# Altium PCB msxbreakout_slim.PcbDoc
Units mil, origin at the board's own origin, x right, y up, seen from the top; angles counter-clockwise.
Board outline 2561 x 2527 mil, 2 copper layers (Top Layer, Bottom Layer), stack 65.74 mil thick; 63 components, 100 nets, 277 pads, 162 vias.
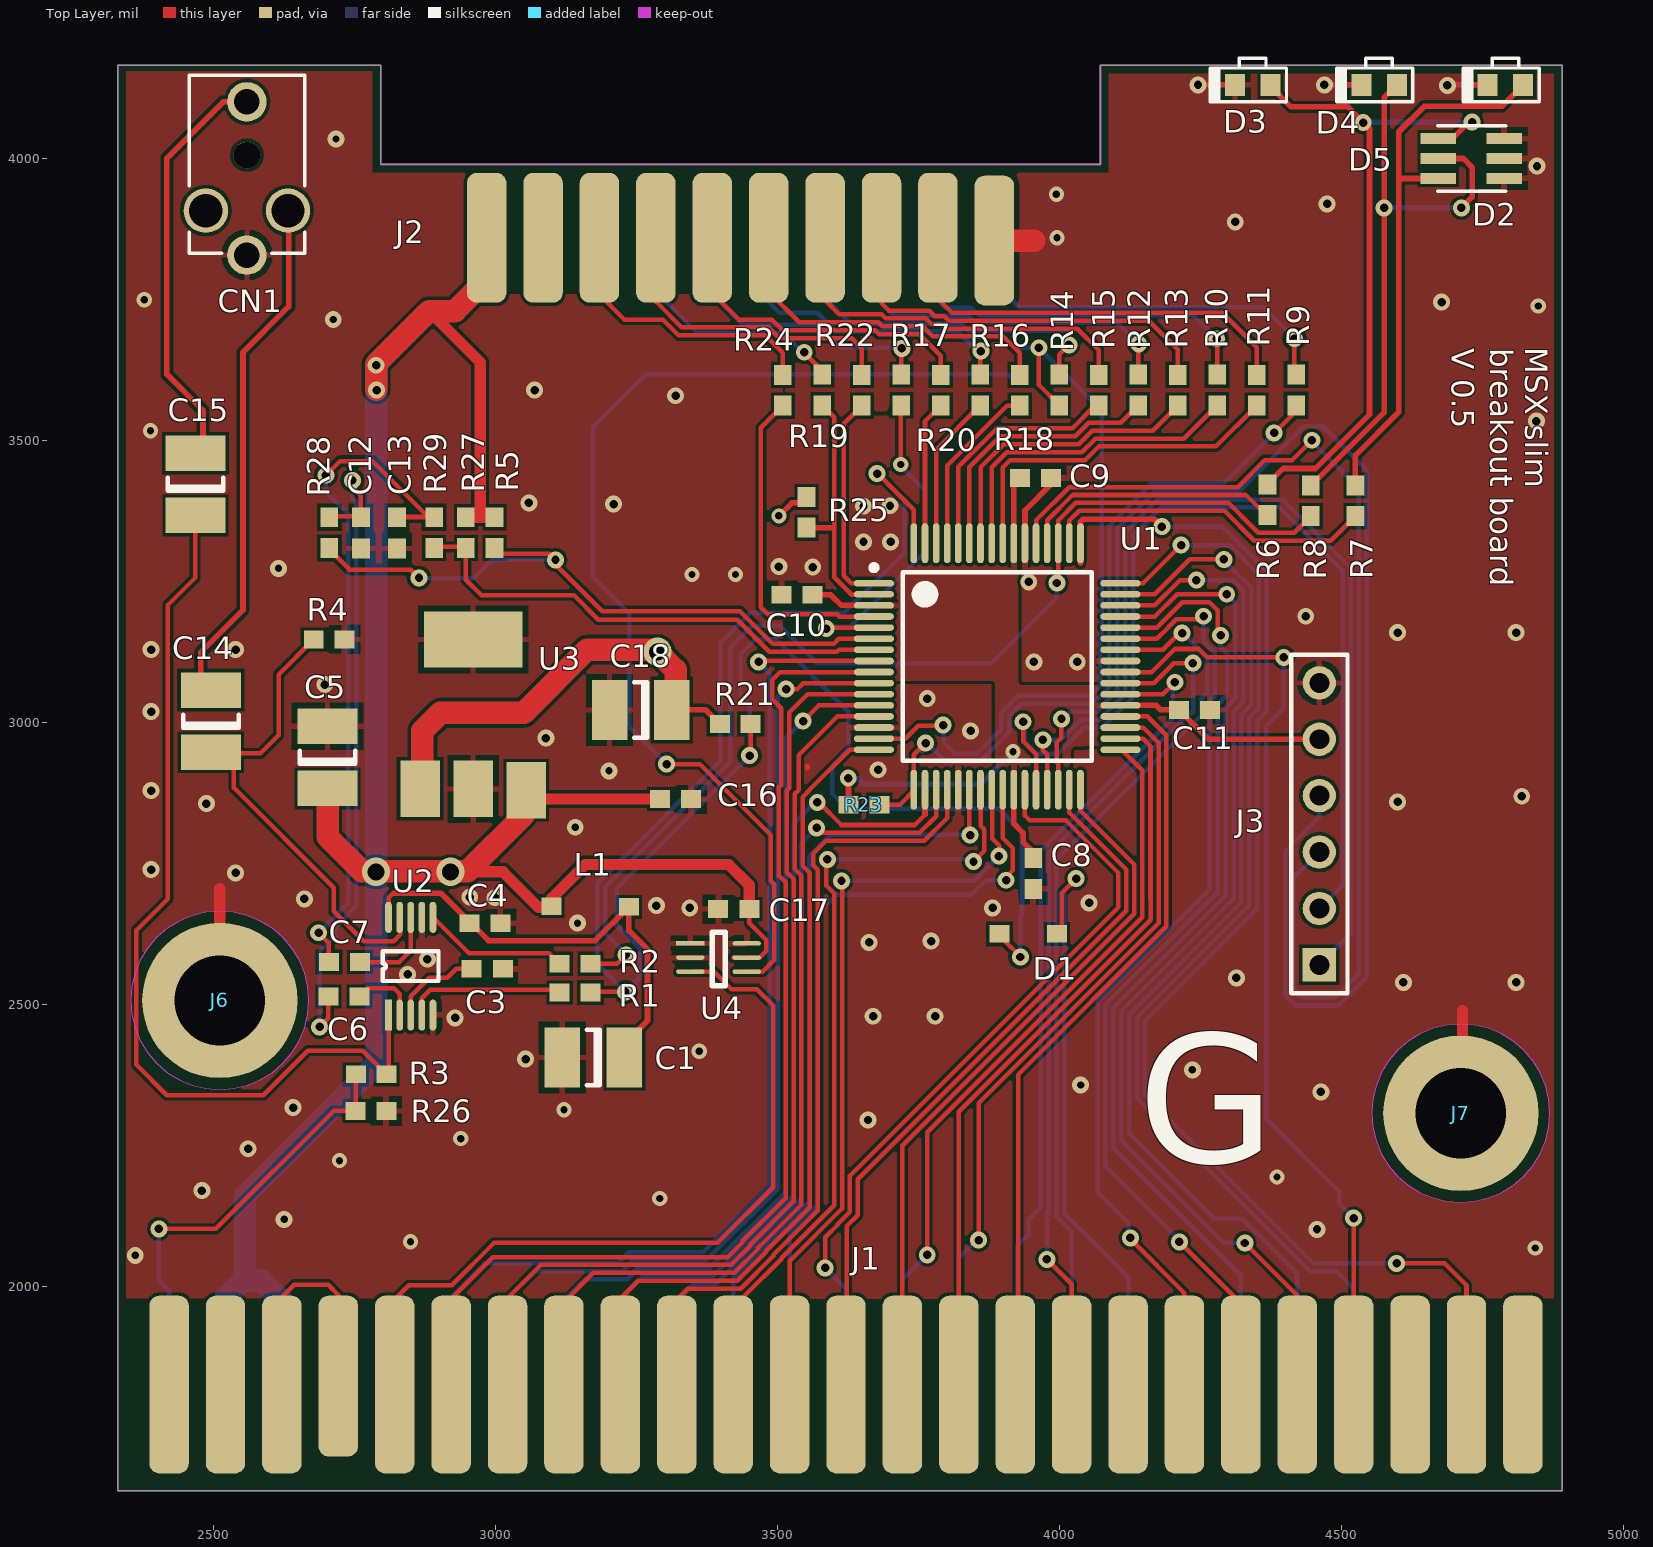
[diagram p0: Top Layer view]
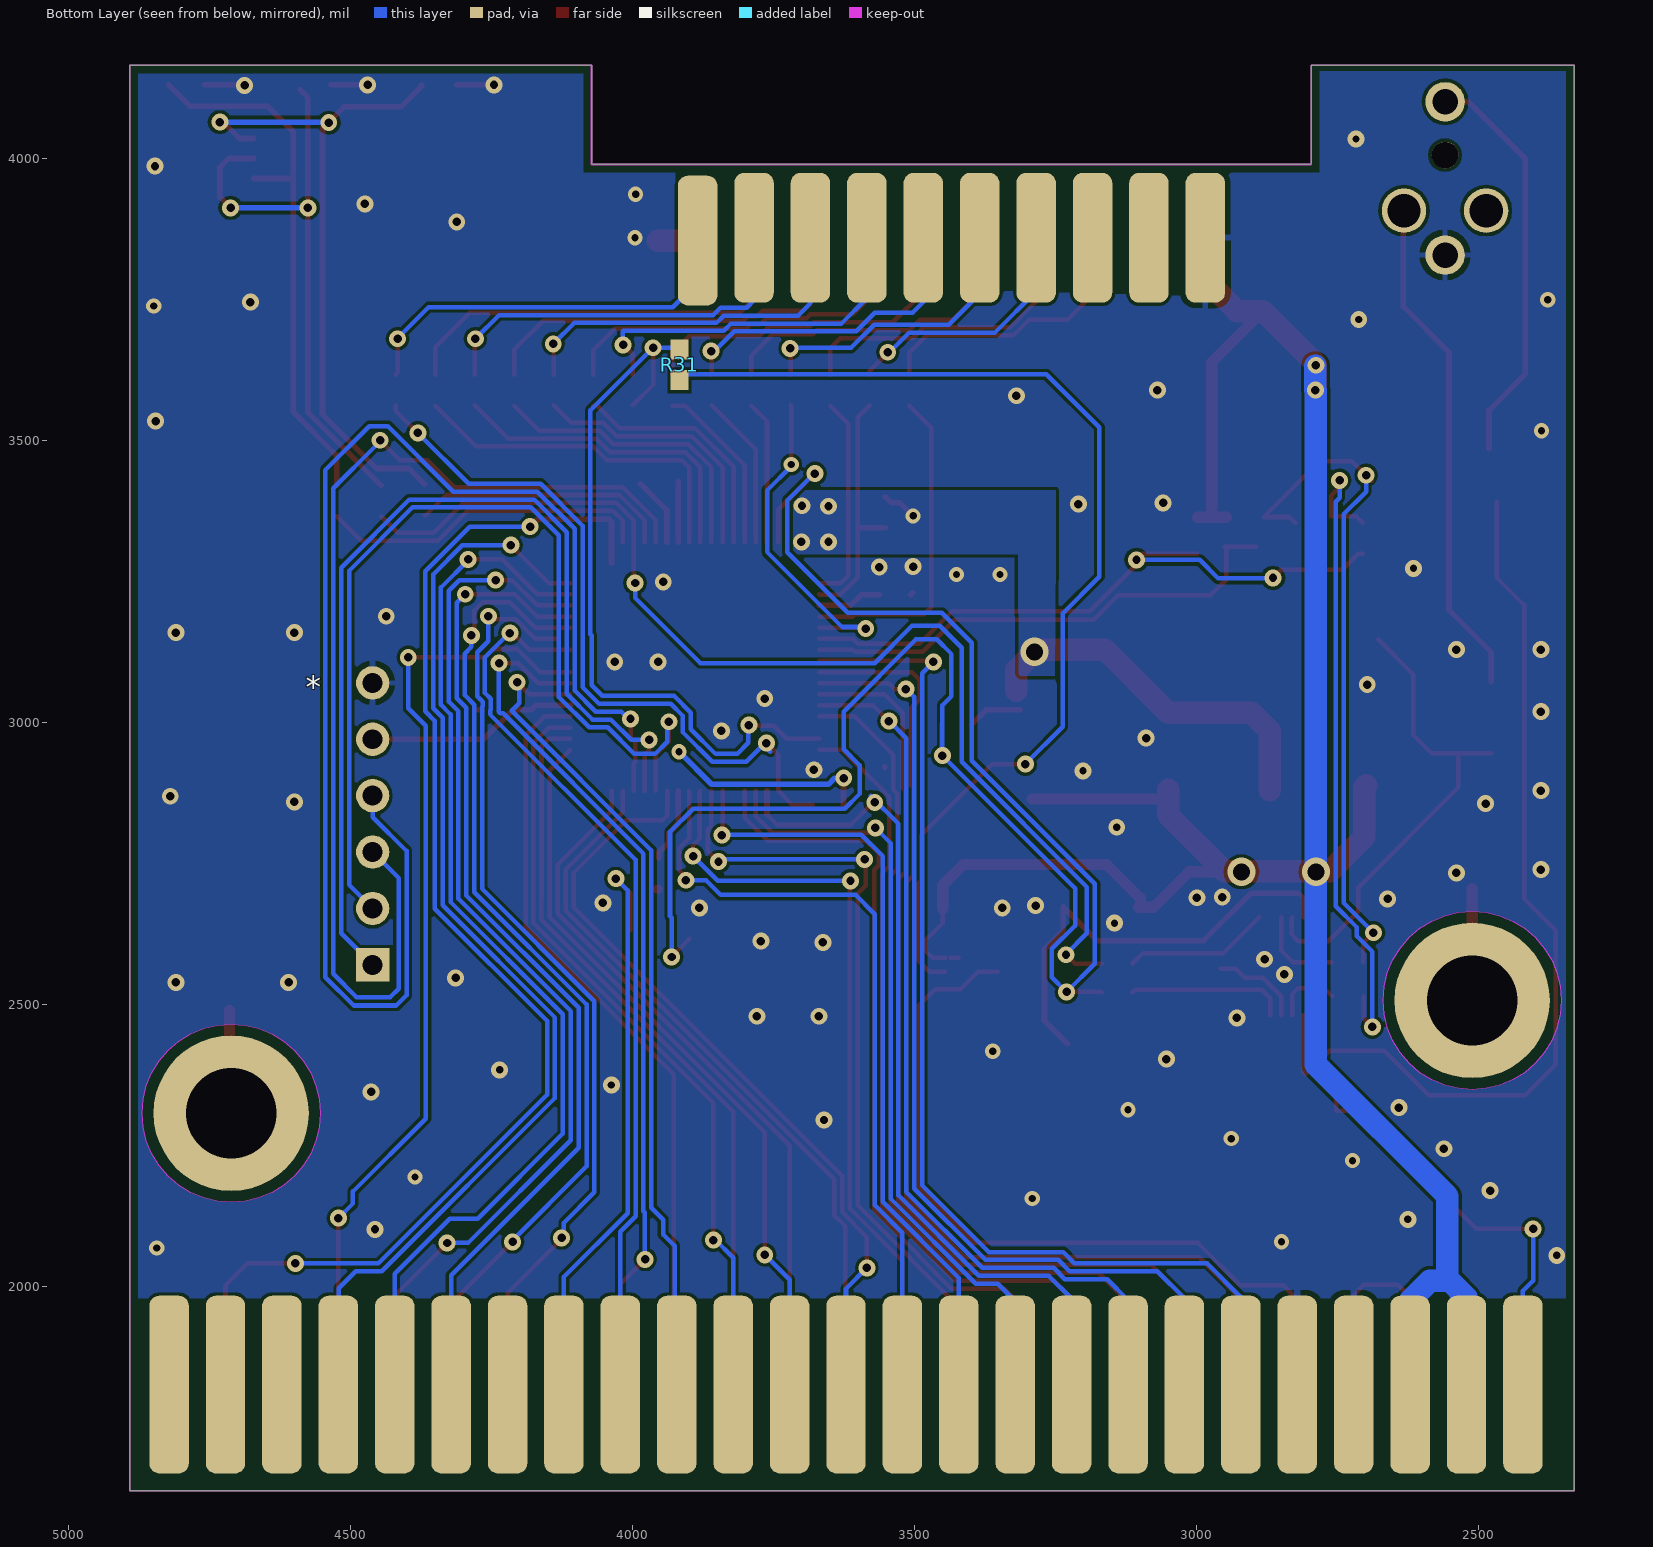
[diagram p1: Bottom Layer view, seen from below]
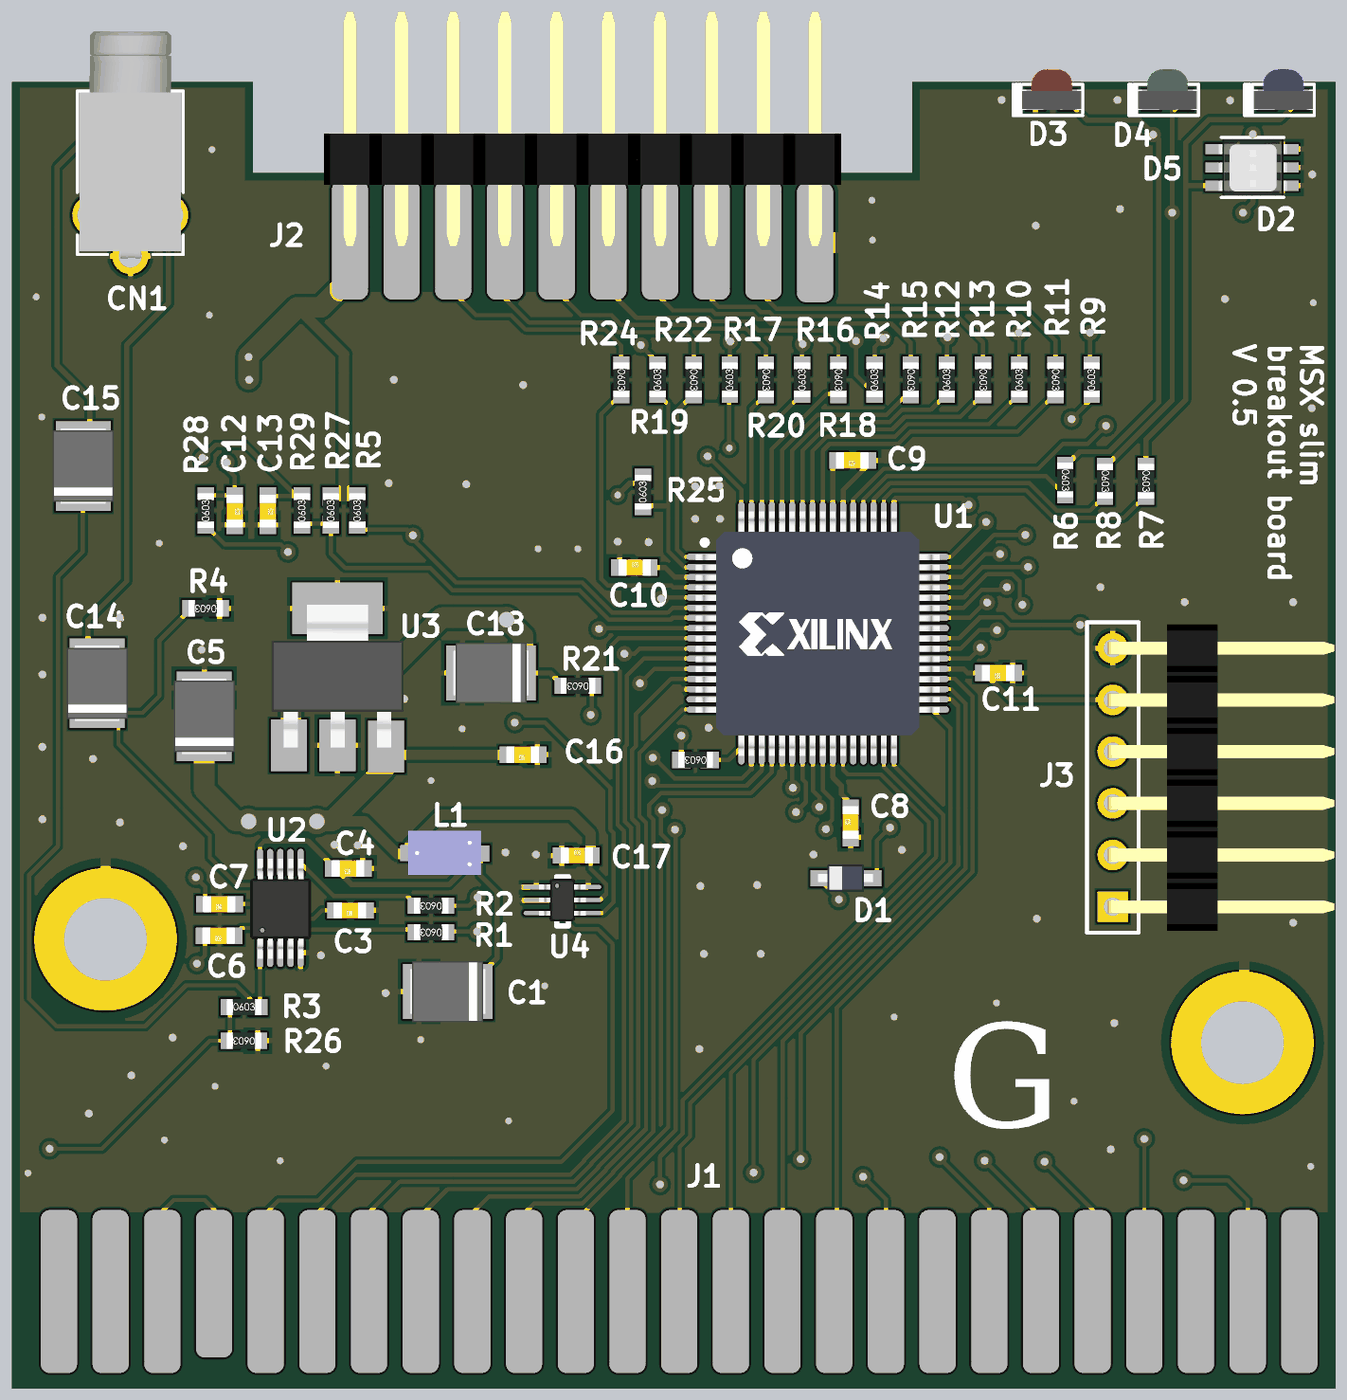
[diagram p2: 3D render of the assembled board from above, using the file's embedded part models]

## Layer stack, top to bottom
Top Solder: solder mask 0.4, Solder Resist, Dk 3.5
Top Layer: signal copper 1.37
Dielectric1: core 63, FR-4, Dk 4.2
Bottom Layer: signal copper 1.37
Bottom Solder: solder mask 0.4, Solder Resist, Dk 3.5

## Board outline
2331,1639 2331,4166 2797,4166 2797,3990 4073,3990 4073,4166 4892,4166 4892,1639

## Design rules (kind name [scope] priority, off if disabled: settings)
Clearance [All] p1: gap=6
HoleSize [All] p1: absolutevalues=TRUE maxlimit=200 minlimit=13 maxpercent=80.000 minpercent=20.000
MinimumAnnularRing [All] p1: minimumring=7
MinimumSolderMaskSliver [All] p1: minsoldermaskwidth=6
PolygonConnect PolygonConnect_Pads [(InPadClass('All Pads'))] p1: connectstyle=Relief reliefconductorwidth=10 reliefentries=4 polygonreliefangle="90 Angle" airgapwidth=10
PolygonConnect [All] p2: connectstyle=Direct reliefconductorwidth=10 reliefentries=4 polygonreliefangle="90 Angle" airgapwidth=10
RoomDefinition msxbreakout_slim [InComponentClass('msxbreakout_slim')] p1: confinementstyle=ConfineIn formatcopy=TRUE lockcomponents=FALSE outline 2071,1578 5147,1578 5147,4365 2071,4365
RoutingVias [All] p1: holewidth=15 width=30 viastyle="Through Hole" minholewidth=13 minwidth=30 maxholewidth=50 maxwidth=50
SilkToSilkClearance [All] p1: silktosilkclearance=6
SilkToSolderMaskClearance SilkscreenOverComponentPads [IsPad] p1: minsilkscreentomaskgap=6 clearancetoexposedcopper=TRUE
SolderMaskExpansion [All] p1: expansion=4
UnpouredPolygon [All] p1: allowunpoured=FALSE
Width [All] p1: maxlimit=50 minlimit=8 preferedwidth=10
25 further rules are at their usual default settings.

## Components (designator, comment, footprint, x,y, rotation, side; value= is the part's Value field where it differs from the comment)
C1 "Cap Pol1" cap1210POL 3174,2407 r180 top
C3 "Cap" cap0603 2986,2564 r180 top
C4 "Cap" cap0603 2982,2645 r180 top
C5 "Cap Pol1" cap1210POL 2703,2939 r90 top
C6 "Cap" cap0603 2732,2515 r180 top
C7 "Cap" cap0603 2733,2576 r180 top
C8 "Cap" cap0603 3954,2733 r90 top
C9 "Cap" cap0603 3958,3434 r180 top
C10 "Cap" cap0603 3535,3227 r0 top
C11 "Cap" cap0603 4240,3023 r180 top
C12 "Cap" cap0603 2762,3337 r270 top
C13 "Cap" cap0603 2826,3337 r270 top
C14 "Cap Pol1" cap1210POL 2496,3003 r90 top
C15 "Cap Pol1" cap1210POL 2469,3423 r90 top
C16 "Cap" cap0603 3320,2865 r180 top
C17 "Cap" cap0603 3423,2670 r0 top
C18 "Cap Pol1" cap1210POL 3258,3023 r180 top
CN1 "PhoneJackStereo 4" SJ1-2503A 2560,4101 r90 top
D1 "Diode" SOD323F 3894,2626 r0 top
D2 "ASMT-YTC2-0AA02" ASMT-YTC2-0AA02 4789,4036 r0 top
D3 "APA1606SURCK" LED-0603_LAMP_RED 4343,4131 r180 top
D4 "APA1606SURCK" LED-0603_LAMP_GREEN 4567,4131 r180 top
D5 "APA1606SURCK" LED-0603_LAMP_BLUE 4791,4131 r180 top
J1 "msxcart" msxcart 2422,1777 r0 top
J2 "Header 10X2" HDR2X10_90 2815,3310 r180 top
J3 "Header 1X6" HDR1X6_90 4461,2571 r90 top
J6 "MountHole" MOUNTHOLE 2512,2508 r0 top
J7 "MountHole" MOUNTHOLE 4712,2308 r0 top
L1 "Inductor" ind1206 3168,2675 r0 top
R1 "Res1" res0603 3142,2522 r180 top
R2 "Res1" res0603 3142,2573 r180 top
R3 "Res1" res0603 2780,2377 r0 top
R4 "Res1" res0603 2706,3148 r180 top
R5 "Res1" res0603 2999,3337 r90 top
R6 "Res1" res0603 4369,3396 r270 top
R7 "Res1" res0603 4525,3394 r270 top
R8 "Res1" res0603 4446,3394 r270 top
R9 "Res1" res0603 4420,3590 r90 top
R10 "Res1" res0603 4280,3590 r90 top
R11 "Res1" res0603 4350,3590 r270 top
R12 "Res1" res0603 4140,3590 r90 top
R13 "Res1" res0603 4210,3590 r270 top
R14 "Res1" res0603 4000,3590 r90 top
R15 "Res1" res0603 4070,3590 r270 top
R16 "Res1" res0603 3860,3590 r90 top
R17 "Res1" res0603 3720,3590 r90 top
R18 "Res1" res0603 3930,3590 r270 top
R19 "Res1" res0603 3580,3590 r90 top
R20 "Res1" res0603 3790,3590 r270 top
R21 "Res1" res0603 3426,2998 r180 top
R22 "Res1" res0603 3650,3590 r270 top
R23 "Res1" res0603 3654,2855 r180 top
R24 "Res1" res0603 3510,3590 r270 top
R25 "Res1" res0603 3552,3373 r90 top
R26 "Res1" res0603 2780,2312 r180 top
R27 "Res1" res0603 2948,3337 r90 top
R28 "Res1" res0603 2706,3337 r90 top
R29 "Res1" res0603 2892,3337 r90 top
R31 "Res1" res0603 3917,3635 r270 bottom
U1 "XC9572XL-10VQG64C" VQG64_N 3890,3100 r0 top
U2 "LM4811MM" LM4811MM 2811,2482 r90 top
U3 "Regulator 3V3" sot223_4 2961,2883 r180 top
U4 "74LVC1G57" "SOT-363 PKG" 3121,2669 r0 top

## Footprints (in the part's own frame and the unit in brackets; to place one, negate y for a bottom-side part, rotate by r counter-clockwise, add the part's x,y. Pads: shape width x height; smd on the part's side, far side on the other; paste and mask are expansions set on the pad)
ASMT-YTC2-0AA02 [mm] "LED HIGH BRIGHTNESS RGB 6PLCC"
  rect 1.6x0.5 smd: 1(0,-1.8) 2(0,-0.9) 3(0,0) 4(-2.975,0) 5(-2.975,-0.9) 6(-2.975,-1.8)
  silkscreen extent -3,-2.37 0.08,0.58, body extent -3.15,-2.3 0.25,0.5, height 1.81
cap0603 [mm] "Capacitor 0603"
  rect 0.9x0.8 smd: 1(-0.7,0) 2(0.7,0)
  body extent -0.78,-0.4 0.83,0.4, height 0.3
cap1210POL [mm] "Mixxeo"
  rect 1.6x2.7 smd: 1(-1.4,0) 2(1.4,0)
  silkscreen extent -0.3,-1.25 0.3,1.25, body extent -1.85,-1.5 1.85,1.5, height 1.2
HDR1X6_90 [mm] "Connector; Header; 6 Position"
  rect 1.5x1.5 hole 0.9: 1(0,0)
  round 1.5 hole 0.9: 2(2.54,0) 3(5.08,0) 4(7.62,0) 5(10.16,0) 6(12.7,0)
  silkscreen extent -1.27,-1.27 13.97,1.27, body extent -1.17,-10.89 13.87,0.25, height 2.27
HDR2X10_90 [mil]
  rrect50% 70x230 smd far side: 1(-1070,-545) 3(-970,-550) 5(-870,-550) 7(-770,-550) 9(-670,-550) 11(-570,-550) 13(-470,-550) 15(-370,-550) 17(-270,-550) 19(-170,-550)
  rrect50% 70x230 smd: 2(-1070,-545) 4(-970,-550) 6(-870,-550) 8(-770,-550) 10(-670,-550) 12(-570,-550) 14(-470,-550) 16(-370,-550) 18(-270,-550) 20(-170,-550)
  body extent -1120,-992 -120,-539, height 66
ind1206 [mm]
  rect 0.9x0.8 smd: 1(-1.727,0) 2(1.753,-0.025)
  body extent -1.78,-1.08 1.78,1.08, height 1.51
LED-0603_LAMP_BLUE [mm]
  rect 0.9x1 smd: 1(-0.8,0) 2(0.8,0)
  silkscreen extent -1.52,-1.2 1.91,0.76, body extent -1.5,-1.5 1.5,0.5, height 1
LED-0603_LAMP_GREEN [mm]
  rect 0.9x1 smd: 1(-0.8,0) 2(0.8,0)
  silkscreen extent -1.52,-1.2 1.91,0.76, body extent -1.5,-1.5 1.5,0.5, height 1
LED-0603_LAMP_RED [mm]
  rect 0.9x1 smd: 1(-0.8,0) 2(0.8,0)
  silkscreen extent -1.52,-1.2 1.91,0.76, body extent -1.5,-1.5 1.5,0.5, height 1
LM4811MM [mm]
  rect 1.4x0.3 smd: 1(0,0)
  oval 1.4x0.3 smd: 2(0,-0.5) 3(0,-1) 4(0,-1.5) 5(0,-2) 6(4.4,-2) 7(4.4,-1.5) 8(4.4,-1) 9(4.4,-0.5) 10(4.4,0)
  silkscreen extent 1.53,-2.25 2.87,0.25, body extent -0.29,-2.52 4.61,0.48, height 1.15
MOUNTHOLE [mm]
  round 7 hole 4.064: 1(0,0)
  Keep-Out Layer pour cut-out: 4.012,0 3.963,0.628 3.816,1.24 3.575,1.822 3.246,2.358 2.837,2.837 2.358,3.246 1.822,3.575 1.24,3.816 0.628,3.963 0,4.012 -0.628,3.963 -1.24,3.816 -1.822,3.575 -2.358,3.246 -2.837,2.837 -3.246,2.358 -3.575,1.822 -3.816,1.24 -3.963,0.628 -4.012,0 -3.963,-0.628 -3.816,-1.24 -3.575,-1.822 -3.246,-2.358 -2.837,-2.837 -2.358,-3.246 -1.822,-3.575 -1.24,-3.816 -0.628,-3.963 0,-4.012 0.628,-3.963 1.24,-3.816 1.822,-3.575 2.358,-3.246 2.837,-2.837 3.246,-2.358 3.575,-1.822 3.816,-1.24 3.963,-0.628 4.012,0
msxcart [mil] "MSX cartridge"
  rrect50% 70x314.96 smd far side: 1(2400,50) 3(2300,50) 5(2200,50) 7(2100,50) 9(2000,50) 11(1900,50) 13(1800,50) 15(1700,50) 17(1600,50) 19(1500,50) 21(1400,50) 23(1300,50) 25(1200,50) 27(1100,50) 29(1000,50) 31(900,50) 33(800,50) 35(700,50) 37(600,50) 39(500,50) 41(400,50) 43(300,50) 45(200,50) 47(100,50) 49(0,50)
  rrect50% 70x314.96 smd: 2(2400,50) 4(2300,50) 6(2200,50) 8(2100,50) 10(2000,50) 12(1900,50) 14(1800,50) 16(1700,50) 18(1600,50) 20(1500,50) 22(1400,50) 24(1300,50) 26(1200,50) 28(1100,50) 30(1000,50) 32(900,50) 34(800,50) 36(700,50) 38(600,50) 40(500,50) 42(400,50) 46(200,50) 48(100,50) 50(0,50)
  rrect50% 70x285 smd: 44(300,65)
res0603 [mm]
  rect 0.9x0.8 smd: 1(-0.686,0) 2(0.7,0)
  body extent -0.85,-0.4 0.85,0.4, height 0.56
SJ1-2503A [mm]
  round 1.778 hole 1.143: 1(0,0) 4(-6.9,0)
  round 2 hole 1.5: 2(-4.9,1.85) 3(-4.9,-1.85)
  round 1.2 hole 1.2: $$$(-2.4,0)
  silkscreen extent -6.83,-2.6 1.2,2.6, body extent -7.03,-2.5 4.12,2.5, height 5.04
SOD323F [mm] "SOD323F diode"
  rect 0.9x0.8 smd: A(0,0) K(2.591,0)
  body extent -0.08,-0.66 2.62,0.69, height 0.77
sot223_4 [mil]
  rect 70x100 smd: 1(-94,2.32) 2(0,0) 3(94,0)
  rect 175x100 smd: 2(0,-264.76)
  body extent -128,-272 128,4, height 65
"SOT-363 PKG" [mil]
  rect 50x8 smd: 1(225,-60)
  oval 50x8 smd: 2(225,-85) 3(225,-110) 4(325,-110) 5(325,-85) 6(325,-60)
  silkscreen extent 264,-135 287,-40, body extent 230,-126 320,-44, height 39
VQG64_N [mm] "64-Pin Very Thin Quad Flat Pack (VQG64) - Pb-Free, IPC Medium Density"
  oval 1.8x0.3 smd: 1(-5.55,3.75) 2(-5.55,3.25) 3(-5.55,2.75) 4(-5.55,2.25) 5(-5.55,1.75) 6(-5.55,1.25) 7(-5.55,0.75) 8(-5.55,0.25) 9(-5.55,-0.25) 10(-5.55,-0.75) 11(-5.55,-1.25) 12(-5.55,-1.75) 13(-5.55,-2.25) 14(-5.55,-2.75) 15(-5.55,-3.25) 16(-5.55,-3.75) 33(5.55,-3.75) 34(5.55,-3.25) 35(5.55,-2.75) 36(5.55,-2.25) 37(5.55,-1.75) 38(5.55,-1.25) 39(5.55,-0.75) 40(5.55,-0.25) 41(5.55,0.25) 42(5.55,0.75) 43(5.55,1.25) 44(5.55,1.75) 45(5.55,2.25) 46(5.55,2.75) 47(5.55,3.25) 48(5.55,3.75)
  oval 0.3x1.8 smd: 17(-3.75,-5.55) 18(-3.25,-5.55) 19(-2.75,-5.55) 20(-2.25,-5.55) 21(-1.75,-5.55) 22(-1.25,-5.55) 23(-0.75,-5.55) 24(-0.25,-5.55) 25(0.25,-5.55) 26(0.75,-5.55) 27(1.25,-5.55) 28(1.75,-5.55) 29(2.25,-5.55) 30(2.75,-5.55) 31(3.25,-5.55) 32(3.75,-5.55) 49(3.75,5.55) 50(3.25,5.55) 51(2.75,5.55) 52(2.25,5.55) 53(1.75,5.55) 54(1.25,5.55) 55(0.75,5.55) 56(0.25,5.55) 57(-0.25,5.55) 58(-0.75,5.55) 59(-1.25,5.55) 60(-1.75,5.55) 61(-2.25,5.55) 62(-2.75,5.55) 63(-3.25,5.55) 64(-3.75,5.55)
  silkscreen extent -5.67,-4.25 4.25,4.57, body extent -6,-6.02 6,5.97, height 1.22

## Part data
C1 C5 C14 C15 C18: "Polarized Capacitor"
C3 C4 C6 C7 C8 C9 C10 C11 C12 C13 C16 C17: "Capacitor"
CN1: library part PhoneJackStereo4
D1: "Default Diode"
D2: "Typical RED, GREEN, YELLOW, AMBER GaAs LED"
D3 D4 D5: "1.6x0.6mm RIGHT ANGLE SMD CHIP LED LAMP, Hyper Red"
J2: "Header, 10-Pin, Dual row"
J3: "Header, 6-Pin, Single row"
J6 J7: "Mounting hole"
R1 R2 R3 R4 R5 R6 R7 R8 R9 R10 R11 R12 R13 R14 R15 R16 R17 R18 R19 R20 R21 R22 R23 R24 R25 R26 R27 R28 R29 R31: "Resistor"
U1: "FastFLASH XC900XL, 3.3V High-Performance 72 Macrocell CPLD, 52 User I/Os, 64-Pin VQFP, Speed Grade 10, Commercial Grade, Pb-Free"

## Via types
v1: diameter 30, hole 15, Top Layer to Bottom Layer, tented both sides, 131 vias
v2: diameter 27, hole 13, Top Layer to Bottom Layer, tented both sides, 18 vias
v3: diameter 30, hole 13, Top Layer to Bottom Layer, tented both sides, 10 vias
v4: diameter 50, hole 30, Top Layer to Bottom Layer, tented both sides, 3 vias

## Nets (pads, with @x,y where several pads share a name; then routed paths per layer and width w, separated by ;. In a path a pad name is that pad's centre, name@x,y a point inside that pad or via, vN(x,y) a via of type N, cw(c..) or ccw(c..) an arc to the next point about the centre after c; other vN are vias at no path point)
3V3: C8.2 C9.2 C10.2 C11.2 C18.1 J3.5 R21.2 R23.2 R25.2 U1.3 U1.26 U1.37 U1.55 U3.3 | length 1909.3
  Top Layer w10: C18.1 3373.44,3023 R21.2 ; v2(3503,3367) 3526,3390 3541.44,3390 R25.2 ; C10.2 3595,3227 3613.73,3208.27 U1.3@3669.53,3208.27 ; v1@3625,2891 3626.44,2889.56 R23.2 ; U1.26@3919.53,2879.53 3919.53,2821.26 3936,2804.79 3936,2788.79 3954,2770.79 C8.2 ; U1.55@3919.53,3320.47 C9.2@3919.53,3428 ; U1.37@4110.47,3031.1 4171.9,3031.1 4180,3023 C11.2 4264.44,2971 J3.5
  Top Layer w40: U3.3@2871,2881 2871,2986 2903,3018 3051,3018 3163,3130 3284,3130 3320,3094 C18.1@3320,3057
  Bottom Layer w10: v1@3631,2897 3636,2902 3642,2902 3653,2891 3860,2891 v2(3918,2949)
  other v1: 3626,2902 3653,3321 3701,3321 3653,3384 3700,3385
  other v4: 3288,3126
5V: C5.1 C16.2 C17.2 J1.45 J1.47 J2.20 L1.1 R5.2 R27.2 U3.1 U4.5 | length 4577.8
  Top Layer w8: U4.5@3421.8,2584 U4.5@3437,2584 ; U4.5 3469,2584 3481,2596 3481,2614.8 3450.56,2645.24 C17.2
  Top Layer w20: 2883,3730 2974,3639 ; v4(2921,2736) 3014.16,2736 3077.16,2673 L1.1@3103,2673 ; R27.2 R5.2 ; 2973.5,3364.56 2973.5,3638.56 ; U3.1@3051,2881 3067,2865 C16.2 ; L1.1 3100,2689 3160,2749 3414,2749 3450.56,2712.44 C17.2
  Top Layer w40: C5.1@2700,2889 2703,2886 2703,2798 2764,2737 2951,2737 3051,2837 U3.1@3051,2881 ; v1@2789,3591 v1(2789,3634) 2789,3636 2883,3730 2929,3730 2985,3786 J2.20@2985,3865
  Bottom Layer w40: J1.47 2522,1981 2556,2015 2556,2161 2789,2394 v4(2789,2736) v1@2789,3590 ; 2556,2011 2587,2011 2622,1976 J1.45 ; v1(2790,3590) v1@2790,3633
CT_A0: J1.28 U1.24 | length 1363.5
  Top Layer w8: J1.28 3522,2046 3615,2139 3615,2718 3614,2719 v1(3614,2720) ; U1.24@3880.16,2879.53 3881,2878.69 3881,2795 3894,2782 v1@3894,2761
  Top Layer w10: v1@3887,2768 v1@3894,2761
  Bottom Layer w8: v1(3614,2720) 3849.36,2720 3893,2763.64 v1(3893,2764)
CT_A1: J1.27 U1.25 | length 1385.2
  Top Layer w8: U1.25@3899.84,2879.53 3899.84,2795.96 3918,2777.8 3918,2739 3906,2727 v1(3906,2721)
  Bottom Layer w8: J1.27 3522,2096.21 3571,2145.21 3571,2661 3605,2695 3844.15,2695 3870.15,2721 v1(3906,2721)
CT_A2: J1.30 U1.23 | length 1386.2
  Top Layer w8: J1.30 J1.30@3422,1969 ; J1.30@3440.99,1983 3508,2050.01 3508,2051.8 3601,2144.8 3601,2697.64 3587,2711.64 v1@3587,2758 ; v1(3848,2754) 3867,2773 3867,2811.36 3860.47,2817.88 U1.23@3860.47,2879.53
  Top Layer w10: v1@3587,2758 v1(3589,2758)
  Bottom Layer w8: v1(3589,2758) v1@3848,2758
CT_A3: J1.29 U1.22 | length 1384.4
  Top Layer w8: v1@3840.79,2812.21 U1.22@3840.79,2879.53
  Top Layer w10: v1@3840.79,2812.21 v1@3851,2802
  Bottom Layer w8: J1.29 3422,2016.01 3557,2151.01 3557,2764 3595,2802 v1@3851,2802
  other v1: 3842,2801
CT_A4: J1.32 U1.20 | length 1414.9
  Top Layer w8: J1.32 3322,1977.8 3341.2,1997 3435.2,1997 3494,2055.8 3494,2057.6 3572,2135.6 3572,2739.64 3564,2747.64 3564,2768.36 3586.64,2791 3761,2791 3801.42,2831.42 U1.20@3801.42,2879.53
CT_A5: J1.31 U1.19 | length 1380
  Top Layer w8: v1@3575,2808 3578,2805 3752.37,2805 3781.73,2834.36 U1.19@3781.73,2879.53
  Bottom Layer w8: J1.31 3322,1974.8 3353.2,2006 3392.2,2006 3543,2156.8 3543,2787 v1@3571.5,2815.5
  other v1: 3570,2814
CT_A6: J1.22 U1.34 | length 1329.6
  Top Layer w8: J1.22 3822,2310.8 4162,2650.8 4162,2688.43 4161.81,2688.62 4161.81,2958.95 4148.71,2972.05 U1.34@4110.47,2972.05
CT_A7: J1.21 U1.35 | length 1365
  Top Layer w8: v1(3857,2083) 3857,2326.01 4176,2645.01 4176,2964.56 4148.83,2991.73 U1.35@4110.47,2991.73
  Bottom Layer w8: J1.21 3822,2052 3855,2085 v1(3857,2083)
CT_A8: J1.24 U1.32 | length 1262.3
  Top Layer w8: J1.24 3722,2250.4 4133,2661.4 4133,2749 4037.64,2844.36 U1.32@4037.64,2879.53
CT_A9: J1.17 U1.42 | length 1584.5
  Top Layer w8: U1.42@4110.47,3129.53 4183.31,3129.53 4212.79,3159 v1@4213.57,3159
  Bottom Layer w8: J1.17@4023,1828 J1.17 4022,2098.2 3995,2125.2 3995,2757 4253,3015 4253,3022.6 4252,3023.6 4252,3043 4262,3053 4262,3116.36 v1@4222.5,3155.86
  other v1: 4218,3159
CT_A10: J1.20 U1.36 | length 1355
  Top Layer w8: J1.20 3927,1832 3927,2376.21 4190,2639.21 4190,2978 4156,3012 U1.36@4111.06,3012
CT_A11: J1.19 U1.38 | length 1482.3
  Top Layer w8: U1.38@4110.47,3050.79 4183.79,3050.79 4202,3069 v1@4202,3076
  Bottom Layer w8: J1.19 3926,1831 3926,2073 3946,2093 3946,2119.4 3967,2140.4 3967,2773.8 4214.6,3021.4 4201,3035 4201,3075 v1@4202,3076
  other v1: 4205,3072
CT_A12: J1.23 U1.33 | length 1316.5
  Top Layer w8: v1(3766,2057) 3766,2274.6 4147,2655.6 4147,2915.83 U1.33@4110.47,2952.36
  Bottom Layer w8: J1.23 3722,2013 v1(3766,2057)
CT_A13: J1.26 U1.31 | length 1300.2
  Top Layer w8: J1.26 3623,1828 3623,2107.4 3643,2127.4 3643,2191.2 4119,2667.2 4119,2740 4017.95,2841.05 U1.31@4017.95,2879.53
CT_A14: J1.25 U1.27 | length 1389.4
  Top Layer w8: v1(3585,2034) 3585,2088 3607,2110 3607,2111.2 3629,2133.2 3629,2197 4105,2673 4105,2734 4012,2827 3948,2827 3939.21,2835.79 U1.27@3939.21,2879.53
  Bottom Layer w8: v1(3585,2034) 3622,1997 J1.25
CT_A15: J1.18 U1.39 | length 1551.6
  Top Layer w8: v1(3978,2049) 4022,2005 J1.18 ; U1.39@4110.47,3070.47 4167.47,3070.47 4203,3106 v1(4237,3106) v1@4238,3107
  Bottom Layer w8: v1(3978,2049) 3979,2050 3979,2132.6 3981,2134.6 3981,2768 4229.8,3016.8 4235,3016.8 4238,3019.8 v1@4238,3107
CT_BUSDIR: J1.10 U1.46 | length 1889.5
  Top Layer w8: U1.46@4110.47,3208.27 4169.47,3208.27 4214.2,3253 v1(4243,3253) ; v1(4329,2078) 4422,1985 J1.10
  Bottom Layer w8: v1(4243,3253) 4307.36,3253 4326,3234.36 4326,3037.8 4309,3020.8 4309,2688.21 4110,2489.21 4110,2260 4292,2078 v1(4329,2078)
CT_CLOCK: J1.42 U4.3 | length 1391.3
  Top Layer w8: J1.42 2822,1978 2847,2003 2923,2003 2998,2078 3394,2078 3493,2177 3493,2499 3464,2528 3419,2528 3388,2559 U4.3@3353,2559
CT_CS1\: J1.1
CT_CS2\: J1.2
CT_CS12\: J1.3
CT_D0: J1.34 U1.16 | length 1446.9
  Top Layer w8: J1.34 3222,1979 3254,2011 3429.4,2011 3480,2061.6 3480,2063.4 3558,2141.4 3558,2733.85 3545,2746.85 3545,2847 ; 3545,2848.44 3545,2868.36 3557,2880.36 3557,2881 3628.36,2952.36 U1.16@3669.53,2952.36
CT_D1: J1.33 U1.18 | length 1516
  Top Layer w8: v1@3575.5,2857.5 3614,2819 3743.75,2819 3762,2837.25
  Top Layer w10: 3762,2837.25 U1.18@3762,2879.48
  Bottom Layer w8: J1.33 3222,1979 3263,2020 3386.4,2020 3529,2162.6 3529,2821 3578,2870 v1@3578,2871
  other v1: 3571,2859
CT_D2: J1.36 U1.13 | length 1604.3
  Top Layer w8: J1.36@3122,1973 3174,2025 3423.6,2025 3466,2067.4 3466,2069.2 3543,2146.2 3543,2729.05 3531,2741.05 3531,2874.15 3538,2881.15 3538,2943 3606.42,3011.42 U1.13@3669.53,3011.42
  Top Layer w10: J1.36 J1.36@3122,1973
CT_D3: J1.35 U1.12 | length 1606.1
  Top Layer w8: v1(3546,3003) 3574.1,3031.1 U1.12@3669.53,3031.1
  Bottom Layer w8: J1.35@3122,1977 3159,2014 3234,2014 3254,2034 3380.6,2034 3515,2168.4 3515,2973 v1@3544,3002
  Bottom Layer w10: J1.35 J1.35@3122,1977 ; v1@3544,3002 v1@3544,3005
CT_D4: J1.38 U1.11 | length 1767
  Top Layer w8: J1.38 3022,1980 3081,2039 3417.8,2039 3452,2073.2 3452,2074.99 3529,2151.99 3529,2723.25 3517,2735.25 3517,2879.95 3521,2883.95 3521,3018 3553.79,3050.79 U1.11@3669.53,3050.79
CT_D5: J1.37 U1.10 | length 1763.5
  Top Layer w8: v1(3516,3060) 3536,3060 3546.47,3070.47 U1.10@3669.53,3070.47
  Bottom Layer w8: J1.37@3022,1980 3070,2028 3225.75,2028 3245.75,2048 3374.8,2048 3501,2174.2 3501,3046 3514,3059 v1@3514,3062
  Bottom Layer w10: J1.37 J1.37@3022,1980
CT_D6: J1.40 U1.9 | length 1936
  Top Layer w8: J1.40 2922,1979 2996,2053 3412,2053 3438,2079 3438,2080.79 3515,2157.79 3515,2717.45 3503,2729.45 3503,2885.75 3507,2889.75 3507,3026 3491,3042 3491,3076 3505.16,3090.16 U1.9@3669.53,3090.16
CT_D7: J1.39 U1.8 | length 1939
  Top Layer w8: v1@3468.84,3109.84 U1.8@3669.53,3109.84
  Bottom Layer w8: J1.39@2922,1982 2982,2042 3217.12,2042 3237.12,2062 3369,2062 3487,2180 3487,3088 v1(3467,3108)
  Bottom Layer w10: J1.39 J1.39@2922,1982
CT_INT\: J1.8 U1.40 | length 1676.7
  Top Layer w8: U1.40@4110.47,3090.16 4163.74,3090.16 4204.59,3131 4247.36,3131 4262.36,3116 v1(4398,3116) ; J1.8 v1(4522,2122)
  Bottom Layer w8: v1(4398,3116) 4398,3026 4367,2995 4367,2298.36 4496,2169.36 4496,2148 v1(4522,2122)
CT_IOREQ\: J1.11 U1.45 | length 1793.2
  Top Layer w8: U1.45@4110.47,3188.58 4169.58,3188.58 4209,3228 v1(4297,3228)
  Bottom Layer w8: v1(4297,3228) 4312,3213 4312,3043.6 4295,3026.6 4295,2694.01 4096,2495.01 4096,2247 4322,2021 J1.11
CT_M1\: J1.9 U1.47 | length 1932.4
  Top Layer w8: U1.47@4110.47,3227.95 4110.52,3228 4169.4,3228 4231.4,3290 v1(4291.85,3290)
  Bottom Layer w8: v1(4291.85,3290) 4291,3289.15 4340,3240.15 4340,3032.01 4323,3015.01 4323,2682.41 4124,2483.41 4124,2272 4275,2121 4324.2,2121 4422,2023.2 J1.9
CT_MREQ\: J1.12 U1.44 | length 1763.8
  Top Layer w8: U1.44@4110.47,3168.9 4173.1,3168.9 4179,3174.8 4179,3175.15 4217.85,3214 4266.36,3214 4281,3199.36 4281,3160 v1(4286,3155) ; v1(4213,2080) 4322,1971 J1.12
  Bottom Layer w8: v1(4213,2080) 4213,2083 4082,2214 4082,2500.8 4281,2699.8 4281,3032.4 4298,3049.4 4298,3122.8 4286,3134.8 v1(4286,3155)
CT_RD\: J1.14 U1.43 | length 1662.5
  Top Layer w8: v1@4121.5,2084.5 4126.5,2084.5 4222,1989 J1.14 ; U1.43@4134,3149 4173,3149 4193,3169 4193,3169.36 4207.64,3184 4251,3184 v1(4256,3189)
  Bottom Layer w8: v1@4122,2085 4122,2114 4068,2168 4068,2506.6 4267,2705.6 4267,3028.4 4266,3029.4 4266,3037.2 4276,3047.2 4276,3125 4256,3145 v1(4256,3189)
  other v1: 4126,2087
CT_RESERV1: J1.5
CT_RESERV2: J1.16
CT_RESET\: D1.K J1.15 | length 1055
  Top Layer w8: D1.K@4004.56,2632 4004.56,2698.56 v1(4030,2724)
  Bottom Layer w8: v1(4030,2724) 4009,2703 4009,2131 4122,2018 J1.15
CT_RFSH\: J1.6
CT_SLTSL\: J1.4 U1.49 | length 2347.1
  Top Layer w8: v1(4598,2042) 4683,2042 4722,2003 J1.4
  Top Layer w10: U1.49@4037.64,3283.36 4037.64,3320.47 4037.64,3356.64 4042,3361 4169,3361 v1(4182,3348)
  Bottom Layer w8: v1(4182,3348) 4289,3348 4368,3269 4368,3020.41 4351,3003.41 4351,2670.81 4152,2471.81 4152,2340.8 4450.8,2042 v1(4598,2042)
CT_WAIT\: J1.7 U1.48 | length 2004.6
  Top Layer w8: U1.48@4110.47,3247.64 4148.64,3247.64 v1(4216,3315)
  Bottom Layer w8: v1(4216,3315) 4302.2,3315 4354,3263.2 4354,3026.21 4337,3009.21 4337,2676.61 4138,2477.61 4138,2335 4445,2028 4491,2028 4521,1998 4521,1828 J1.7
CT_WR\: J1.13
E1: R9.1 R23.1 U1.17 | length 1296.1
  Top Layer w8: R23.1 3717.83,2855 3742.36,2879.53 3742.36,2943.36 v1(3763,2964) ; v1(4381,3514) 4420,3553 R9.1
  Bottom Layer w8: 3756,2949 3765,2958 3772,2958 3799,2931 3859,2931 3911,2983 3911,3012.36 3932.64,3034 4059.8,3034 4089,3063.2 4089,3349.75 4163.25,3424 4291,3424 v1(4381,3514)
E2: R11.2 U1.56 | length 627.9
  Top Layer w8: U1.56@3899.84,3320.47 3899.84,3452.84 3913,3466 4046.01,3466 4070.01,3490 4277.56,3490 R11.2
E3: R10.1 U1.57 | length 577.9
  Top Layer w8: U1.57@3880.16,3320.47 3880.16,3452.96 3907.2,3480 4040.21,3480 4064.21,3504 4221,3504 R10.1
E4: R13.2 U1.58 | length 527.4
  Top Layer w8: U1.58@3860.47,3320.47 3860.47,3453.07 3901.4,3494 4034.41,3494 4058.41,3518 4165.56,3518 R13.2
E5: R12.1 U1.59 | length 477.4
  Top Layer w8: U1.59@3840.79,3320.47 3840.79,3453.18 3895.6,3508 4028.61,3508 4052.61,3532 4109,3532 R12.1
E6: R15.2 U1.60 | length 427.4
  Top Layer w8: U1.60@3821.1,3320.47 3821.1,3454.1 3889,3522 4022.81,3522 4063.25,3562.44 R15.2
E7: R14.1 R31.1 U1.15 | length 1310.3
  Top Layer w8: U1.15@3669.53,2972.05 3727.05,2972.05 3750,2995 3793,2995 v1(3794,2996) ; v1(3964,3665) 3964,3599 R14.1
  Bottom Layer w8: v1@3795,2988 3795,2964.64 3814.64,2945 3853.2,2945 3897,2988.8 3897,3018.15 3926.85,3048 4054,3048 4073,3067 4073,3155.36 4075,3157.36 4075,3554 v1(3964,3665) R31.1@3927,3665
E8: R18.2 U1.61 | length 308.4
  Top Layer w8: U1.61@3801.42,3320.47 3801.42,3456.42 3907.44,3562.44 R18.2
E9: R16.1 U1.62 | length 274.9
  Top Layer w8: U1.62@3781.73,3320.47 3781.73,3484.73 R16.1
E10: R20.2 U1.63 | length 253.5
  Top Layer w8: U1.63@3762.05,3320.47 3762.05,3534.49 R20.2
E11: R17.1 U1.5 | length 590.7
  Top Layer w8: v1(3587,3167) 3587,3168.8 3587.1,3168.9 U1.5@3669.53,3168.9 ; v2(3719,3458) 3719,3562 R17.1
  Bottom Layer w8: v1@3589,3170 3629,3170 3762,3303 3762,3412 3719,3455 v2(3719,3458)
E12: R22.2 U1.1 | length 371.7
  Top Layer w8: R22.2 3618,3530.44 3618,3261.04 3631.4,3247.64 U1.1@3669.53,3247.64
E13: R19.1 R25.1 U1.2 | length 442.3
  Top Layer w8: R19.1 3601,3542 3601,3258.24 3632.24,3227 3668.57,3227 U1.2@3669.53,3227.95
  Top Layer w10: R25.1 3599,3346
E14: R24.2 U1.4 | length 578.9
  Top Layer w8: R24.2 3471,3523.44 3471,3205 3483.64,3192.36 3606.22,3192.36 3610,3188.58 U1.4@3669.53,3188.58
GND: C1.2 C3.1 C4.1 C5.2 C8.1 C9.1 C10.1 C11.1 C12.2 C13.2 C16.1 C17.1 C18.2 CN1.4 D2.1 D2.2 D2.3 D3.2 D4.2 D5.2 J1.41 J1.43 J2.2 J2.19 J3.6 J6.1 J7.1 R4.1 R26.1 U1.14 U1.21 U1.41 U1.54 U2.5 U2.7 U3.2 U4.1 U4.2 U4.6 | length 795.2
  Top Layer w10: C10.1@3504,3230.44 C10.1 ; 3553,2921 3553,2922 ; U1.54@3939.21,3320.47 3939.21,3376.65 C9.1@3986.56,3424 ; v1(4246,4131) D3.2 ; C11.1 C11.1@4275,3023 ; v1(4470,4131) D4.2 ; v1(4688,4130) 4689,4131 D5.2 ; J7.1 J7.1@4715,2311
  Top Layer w15: C8.1 C8.1@3957.56,2705.44
  Top Layer w20: J6.1 2512,2706 ; J7.1@4715,2311 4715,2490
  Top Layer w40: J2.2 3956,3855
  other v1: 4457,2102 2480,2171 2562,2245 3661,2296 2642,2318 4464,2346 3054,2404 2929,2477 3670,2480 3780,2480 4610,2540 4810,2540 4314,2548 2845,2554 2880,2581 3663,2611 3773,2613 3345,2672 3882,2672 3286,2676 4053,2681 2662,2688 3000,2690 2955,2691 2540,2734 2390,2740 2488,2857 4600,2860 4820,2870 2390,2880 3679,2917 3090,2973 3843,2986 2390,3020 3766,3043 2698,3068 3955,3108 4032,3108 2390,3130 2540,3130 4600,3160 4810,3160 4437,3189 3946,3250 3563,3276 3503,3277 3210,3388 3060,3390 4846,3535 3320,3580 3070,3590 4678,3746 4312,3888 4475,3920 4847,3987
  other v2: 4844,2069 2850,2080 3292,2157 4386,2195 2724,2224 2939,2263 3122,2314 3362,2418 3349,3263 3426,3263 2389,3518 4849,3739 2378,3750 3996,3860 3995,3937
  other v3: 2362,2056 2626,2120 4038,2358 4236,2385 3146,2645 3142,2815 3202,2915 2616,3274 2713,3715 2718,4035
JTAG_TCK: J3.4 U1.30 | length 2538.9
  Top Layer w8: v1@3995,3006 v1@3996,3005 ; U1.30@3998,2879.8 3998,2928 3996,2930 3996,2966 4004,2974 v1(4004,3007)
  Bottom Layer w8: v1(4004,3007) 4007,3007 4020,3020 4065.6,3020 4103,3057.4 4103,3343.95 4169.05,3410 4318,3410 4434,3526 4467.2,3526 4545,3448.2 4545,2549.2 4494.8,2499 4419,2499 4401,2517 4401,2773 4461,2833 J3.4
JTAG_TDI: J3.2 U1.28 | length 1753.1
  Top Layer w8: v1(3936,3002) 3936,2967 3959,2944 3959,2879.63 3958.9,2879.53 U1.28@3959,2879.43
  Bottom Layer w8: v1(3936,3002) 3939,2999 3939,2966.64 3960.64,2945 3997.55,2945 4044.55,2992 4077.2,2992 4131,3045.8 4131,3332.36 4180.64,3382 4390.4,3382 4503,3269.4 4503,2713 J3.2
JTAG_TDO: J3.3 U1.53 | length 1960.8
  Top Layer w8: U1.53@3958.9,3320.47 3958.9,3359.09 4017.8,3418 4316.39,3418 4364.39,3466 4413,3466 v1(4448,3501) ; v1@4456,3496 v1@4456,3497
  Bottom Layer w8: v1@4456,3497 4456,3491 4531,3416 4531,2555 4490,2514 4430,2514 4415,2529 4415,2725 J3.3
JTAG_TMS: J3.1 U1.29 | length 1761.9
  Top Layer w8: v1(3971,2970) 3971,2951.8 3978.58,2944.22 3978.58,2879.53 U1.29@3979,2879.11
  Bottom Layer w8: v1(3971,2970) 4002.75,2970 4038.75,3006 4071.4,3006 4117,3051.6 4117,3338.15 4174.85,3396 4396.2,3396 4517,3275.2 4517,2627 J3.1
LED_B: R2.1 R8.2 U1.51 | length 2024.1
  Top Layer w8: R2.1 3216,2573 v1(3232,2589) ; v1(3996,3248) 3998.27,3250.27 3998.27,3320.47 3998.27,3358.87 4029.4,3390 4300,3390 4343.25,3346.75 4343.25,3346.58 4352.83,3337 4416.56,3337 R8.2
  Bottom Layer w8: v1(3232,2589) 3232,2590 3195,2627 3195,2709 3417,2931 3417,3133 3456,3172 3505,3172 3571,3106 3880,3106 3996,3222 v1(3996,3248)
LED_G: R7.2 U1.50 | length 592.4
  Top Layer w8: U1.50@4017.95,3320.47 4017.95,3358.75 4035.2,3376 4293,3376 4346,3323 4481.56,3323 R7.2
LED_R: R6.2 U1.52 | length 462.3
  Top Layer w8: U1.52@3978.58,3320.47 3978.58,3358.98 4023.6,3404 4331,3404 4366.56,3368.44 R6.2
LEFT_PHONE: R5.1 R28.1 U1.6 | length 1175.9
  Top Layer w8: R28.1@2706,3300 2713.83,3300 2742.11,3271.72 2850.28,3271.72 v1(2865,3257) ; R5.1@2999,3300 3096,3300 v1(3107,3289) ; v1@3103,3285 3190,3198 3434,3198 3492,3140 3600,3140 3609.21,3149.21 U1.6@3669.53,3149.21
  Bottom Layer w8: v1(2865,3257) 2866,3256 2962,3256 2995,3289 v1(3107,3289)
NetC1_1: C1.1 C4.2 L1.2 U2.10 | length 797.2
  Top Layer w8: U2.10 2811,2690 2819,2698 2820,2698
  Top Layer w10: 2820,2698 2904,2698 2988,2614 3177,2614 L1.2 3237,2632 3270,2599 3270,2472 C1.1@3229.12,2431.12
NetC3_2: C3.2 U2.3 | length 161.6
  Top Layer w8: U2.3 2850.37,2515.37 2883,2548 2915,2548 2931,2564 C3.2
NetC6_1: C6.1 U2.2 | length 119.1
  Top Layer w8: C6.1 2774.56,2530 2820,2530 2830.68,2519.32 U2.2
NetC6_2: C6.2 C12.1 R28.2 | length 1179.3
  Top Layer w8: v1(2689,2461) 2704.44,2476.44 C6.2 ; R28.2@2706,3354.56 2717.44,3366 2762,3366 2762,3403 v1@2746,3419
  Bottom Layer w8: v1(2689,2461) 2689,2594.64 2716.14,2621.78 2716.14,2637.34 2754,2675.2 2754,3392 2747,3399 2747,3427.88 v1@2748.31,3429.19
  other v1: 2747,3430
NetC7_1: C7.1 U2.8 | length 157.1
  Top Layer w8: C7.1 2830,2576 2850.37,2596.37 U2.8
NetC7_2: C7.2 C13.1 R29.2 | length 1216.1
  Top Layer w8: v1(2687,2628) 2705.44,2609.56 C7.2 ; v1@2690,3429 v1(2700,3439) 2725,3464 2782.56,3464 2881.56,3365 2836.44,3365 C13.1@2826,3354.56
  Bottom Layer w8: v1(2687,2628) 2740,2681 2740,3370 2700,3410 v1(2700,3439)
NetC14_1: C14.1 R4.2 U2.9 | length 895
  Top Layer w8: C14.1@2478,2946 2584,2946 2616,2978 2616,3085.56 R4.2 ; C14.1@2537,2943 2537,2885 2714,2708 2714,2666 2767,2613 2820,2613 2832,2625 U2.9@2832,2653.91 ; U2.9 U2.9@2832,2653.91 ; U2.9@2832,2632.08 U2.9@2832,2653.91
NetC14_2: C14.2 CN1.3 | length 902.6
  Top Layer w10: C14.2@2478,3073 2478,3125 2553,3200 2553,3657 2634,3738 2634,3901.09 CN1.3@2627,3908.09
NetC15_1: C15.1 R3.2 U2.1 | length 1663.4
  Top Layer w8: C15.1@2468,3392 2468,3257 2420,3209 2420,2688 2364.2,2632.2 2364.2,2393.8 2418,2340 2589,2340 2668,2419 2765.56,2419 R3.2 2811,2380.44 U2.1
NetC15_2: C15.2 CN1.1 | length 729.9
  Top Layer w10: C15.2@2482,3486 2482,3554 2418,3618 2418,4001 2518,4101 CN1.1@2565,4101
NetD2_4: D2.4 D3.1 R6.1 | length 1216.3
  Top Layer w10: R6.1 4397,3451 4454,3451 4550,3547 4550,4054 4512,4092 4411,4092 4374.5,4128.5 D3.1 ; D2.4 4697,4036 4729,4068 v1(4732,4065)
  Bottom Layer w10: v1(4539,4064) 4540,4065 v1(4732,4065)
NetD2_5: D2.5 D4.1 R8.1 | length 1045
  Top Layer w10: R8.1 4446.63,3421 4576,3550.37 v1(4576,3913) 4576,4108.5 D4.1@4590,4122.5 ; D2.5 4716.43,4000.57 4732,3985 4732,3932 v1(4713,3913)
  Bottom Layer w10: v1(4576,3913) v1(4713,3913)
NetD2_6: D2.6 D5.1 R7.1 | length 982.6
  Top Layer w10: R7.1 4525,3474 4602,3551 4602,4048 4647,4093 4784.5,4093 D5.1 ; 4603,3965.13 D2.6
NetJ1_44: J1.44 J1.46 | length 273
  Top Layer w8: J1.46 2622,1982 2644,2004 2704,2004 2723,1985
NetJ1_49: J1.49 R3.1 R26.2 | length 782.9
  Top Layer w8: v1(2404,2103) 2505,2103 2714,2312 R26.2 ; R26.2@2753,2312.56 R3.1
  Bottom Layer w8: v1(2404,2103) 2404,2011 2422,1993 J1.49
NetJ2_1: J2.1 R9.2 | length 717.7
  Top Layer w8: v1(4417,3681) 4417,3620.56 R9.2
  Bottom Layer w8: J2.1@3885,3860 3885,3781 3929,3737 4362,3737 4417,3682 v1(4417,3681)
NetJ2_3: J2.3 R10.2 | length 702
  Top Layer w8: v1(4279,3681) 4280,3680 R10.2
  Bottom Layer w8: J2.3@3785,3865 3785,3749 3798,3736 3844.4,3736 3857.4,3723 4237,3723 v1(4279,3681)
NetJ2_4: J2.4 R11.1 | length 762.6
  Top Layer w8: J2.4@3785,3865 3785,3752 3810,3727 4289,3727 4350,3666 R11.1
NetJ2_5: J2.5 R12.2 | length 661.7
  Top Layer w8: R12.2 4140,3671 v1(4141,3672)
  Bottom Layer w8: J2.5@3685,3865 3685,3744 3707,3722 3838.6,3722 3851.6,3709 4104,3709 v1(4141,3672)
NetJ2_6: J2.6 R13.1 | length 725
  Top Layer w8: J2.6@3685,3865 3685,3744 3698,3731 3769.4,3731 3779.4,3721 3796.2,3721 3804.2,3713 4159,3713 4210,3662 R13.1
NetJ2_7: J2.7 R14.2 | length 658.6
  Top Layer w8: R14.2 4000,3653 4009,3662 v1@4018,3662
  Bottom Layer w8: J2.7@3585,3865 3585,3753 3630,3708 3826,3708 3839,3695 4017,3695 4018,3694 v1@4018,3662
  other v1: 4017,3670
NetJ2_8: J2.8 R15.1 | length 681.5
  Top Layer w8: J2.8@3585,3865 3585,3749 3610,3724 3685.2,3724 3692.2,3717 3763.6,3717 3773.6,3707 3790.4,3707 3798.4,3699 4032,3699 4070,3661 R15.1
NetJ2_9: J2.9 R16.2 | length 572.6
  Top Layer w8: v1@3858,3663 3860,3661 R16.2
  Bottom Layer w8: J2.9@3485,3865 3485,3746 3504,3727 3570.8,3727 3603.8,3694 3820.2,3694 3851.2,3663 v1@3858,3663
  other v1: 3861,3659
NetJ2_10: J2.10 R18.1 | length 629.7
  Top Layer w8: J2.10@3485,3865 3485,3764 3539,3710 3679.4,3710 3686.4,3703 3757.8,3703 3775.8,3685 3901,3685 3930,3656 R18.1
NetJ2_11: J2.11 R17.2 | length 528.4
  Top Layer w8: R17.2 3720,3662 v1@3722,3664
  Bottom Layer w8: J2.11@3385,3865 3385,3761 3440,3706 3572,3706 3613,3665 3721,3665 v1@3722,3664
  other v1: 3721,3664
NetJ2_12: J2.12 R20.1 | length 588
  Top Layer w8: J2.12@3385,3865 3385,3762 3432,3715 3490.6,3715 3509.6,3696 3673.6,3696 3680.6,3689 3752,3689 3790,3651 R20.1
NetJ2_13: J2.13 R19.2 | length 462.8
  Top Layer w8: v1@3547,3662 3547,3657 3580,3624 R19.2
  Bottom Layer w8: J2.13@3285,3865 3285,3765 3358,3692 3510,3692 3540,3662 v1@3547,3662
  other v1: 3548,3657
NetJ2_14: J2.14 R22.1 | length 563
  Top Layer w8: J2.14@3286,3864 3286,3746 3331,3701 3484.8,3701 3503.8,3682 3632,3682 3650,3664 R22.1
NetJ2_16: J2.16 R24.1 | length 512.7
  Top Layer w8: J2.16@3185,3865 3185,3759 3229,3715 3297.2,3715 3325.2,3687 3479,3687 3510,3656 R24.1
NetR1_2: R1.2 U2.4 | length 282.8
  Top Layer w8: U2.4@2870,2481.95 U2.4 2870.05,2512.05 2885,2527 3109.44,2527 R1.2
NetR2_2: R2.2 U2.6 | length 258.8
  Top Layer w8: U2.6 2952.97,2592 3095.44,2592 R2.2
NetR31_2: R31.2 U4.4 | length 1962.8
  Top Layer w8: v1(3304,2927) 3363,2927 3489,2801 3489,2720 3495,2714 3495,2580 3474,2559 U4.4
  Bottom Layer w8: v1(3304,2927) 3238,2993 3238,3194 3173,3259 3173,3524 3267,3618 3909.44,3618 R31.2@3922,3605.44
RIGHT_PHONE: R27.1 R29.1 U1.7 | length 888.4
  Top Layer w8: R29.1@2895,3312 R27.1@2951,3312 ; R27.1 2948,3254 2975.7,3226.3 3139.7,3226.3 3183,3183 3429.2,3183 3486.2,3126 3605.8,3126 3609.8,3130 3669.06,3130 U1.7@3669.53,3129.53
SOUND_CLK: D1.A R1.1 R21.1 U1.64 | length 3330.9
  Top Layer w8: R1.1 3170,2523 v1@3229,2523 ; v1(3451,2942) 3453,2944 R21.1 ; v1(3677,3442) 3678,3442 3710,3410 3710.36,3410 3742.36,3377.99 U1.64@3742.36,3320.47 ; D1.A@3900,2617 v1@3933,2584
  Bottom Layer w8: v1(3677,3442) 3678.36,3442 3726,3394.36 3726,3302.26 3618.74,3195 3452,3195 3399,3142 3399,2933 3181,2715 3181,2573 v1(3231,2523) 3257,2549 3257,2599.36 3216,2640.36 3216,2707 v1(3451,2942) 3451,3031 3435,3047 3435,3122 3461,3148 3498,3148 3626,3020 3626,2953 3598,2925 3598,2874 3624,2848 3893,2848 3934,2807 3934,2657.64 3931,2654.64 3931,2586 v1@3934,2583
  other v1: 3931,2585
pads on no net: CN1.2 CN1.$$$ J1.48 J1.50 J2.15 J2.17 J2.18

## Polygon pours and split planes (outlines as drawn)
GND on Top Layer "Top Layer-No Net 1" (solid, pour order 28): 3512.78,3733.32 3846.78,3734.32 3846.78,3759.32 3929.78,3759.32 3925,3975 4088,3975 4088,4151 4877,4151 4877,1980 3509.78,1979.32
GND on Top Layer "Top Layer-No Net 1" (solid, pour order 26): 2346,4155 2346,1980 3510,1980 3510,3760 2950,3760 2950,3975 2782,3975 2782,4155
GND on Top Layer "Top Layer-No Net 1" (solid, pour order 18): 4026,2951 4027,2950 4027,2815 4031,2811 4105,2737 4105,2734 4152,2734 4159,2727 4161.81,2729.81 4161.81,2958.95
GND on Top Layer "Top Layer-No Net 1" (solid, pour order 16): 3574,2951 3574,2817 3576,2819 3743.75,2819 3743.75,2948.75 3745,2950
GND on Top Layer "Top Layer-No Net 1" (solid, pour order 15): 3450,3537.55 3457.57,3529.93 3457.57,3190.09 3633.92,3190.09 3635,3189 3635,3543
3V3 on Top Layer "Top Layer-No Net 1" (solid, pour order 17): 3614,3543 3614,3253.24 3610,3249.24 3610.24,3249 3740,3249 3740,3546 3739,3547
3V3 on Top Layer "Top Layer-No Net 1" (solid, pour order 20): 3705.21,3256.96 3705.21,3074.97 3706.29,3074 3707.36,3074.97 3927,3074.97 3927,3277.29 3920.57,3283.1 3917.36,3286 3702,3286
GND on Top Layer "Top Layer-No Net 1" (solid, pour order 21): 3928,3287 3928,3081.31 3928.88,3080.27 3935.01,3073 4075.12,3073 4075.12,3285.96 4076,3287
GND on Top Layer "Top Layer-No Net 1" (solid, pour order 22): 3703,3082 3705.73,3079 3705.73,2930 3882.86,2930 3888.74,2923.54 3879.86,2933.28 3879.86,3084
GND on Top Layer "Top Layer-No Net 1" (solid, pour order 23): 3526.67,3081.57 3526.67,2933.98 3504,2923.17 3519.05,2916 3876,2916 3876,3076.89
3V3 on Top Layer "Top Layer-No Net 1" (solid, pour order 24): 3878,3093.98 3878,2916.02 4075.04,2916.02 4076.02,2915 4077,2916.02 4077,3095
GND on Bottom Layer "Top Layer-No Net 1" (solid, pour order 25): 2346,4155 2346,1980 3515,1980 3515,3760 3505.37,3770 2945,3755 2945,3975 2782,3975 2782,4155
GND on Bottom Layer "Top Layer-No Net 1" (solid, pour order 27): 3510,3760 3925,3760 3925,3975 4088,3975 4088,4151 4877,4151 4877,1980 3510,1980
3V3 on Bottom Layer "Top Layer-No Net 1" (solid, pour order 19): 3250.5,3412 3732,3412 3732,3303.48 3729.37,3301.8 3724.98,3299 3317,3299 3316,3083 3252,3084 3250.5,3299

## Keep-outs
Keep-Out Layer:
  the board outline again, w3

## Silkscreen, mask and mechanical layers (free items; w line width, h text height)
Top Overlay:
  text "MSX slim" at 4826,3666 h40 r270
  text "V 0.5" at 4696,3664 h40 r270
  text "breakout board" at 4764,3664 h40 r270
  text "G" at 4139,2145 h393.7
Bottom Overlay:
  text "*" at 4552,3044 h40
Mechanical 1:
  text "Licensed under the Creative Commons Attribution-Share Alike 3.0 United States license" at 2295,4450 h40
  text "http://creativecommons.org/licenses/by-sa/3.0/us/" at 2295,4380 h40